# Altium PCB 40V Sample Layout.PcbDoc
Units mil, origin at the board's own origin, x right, y up, seen from the top; angles counter-clockwise.
Board outline 1700 x 2030 mil, 4 copper layers (Top Layer, MidLayer1, MidLayer2, Bottom Layer); 21 components, 11 nets, 44 pads, 36 vias.
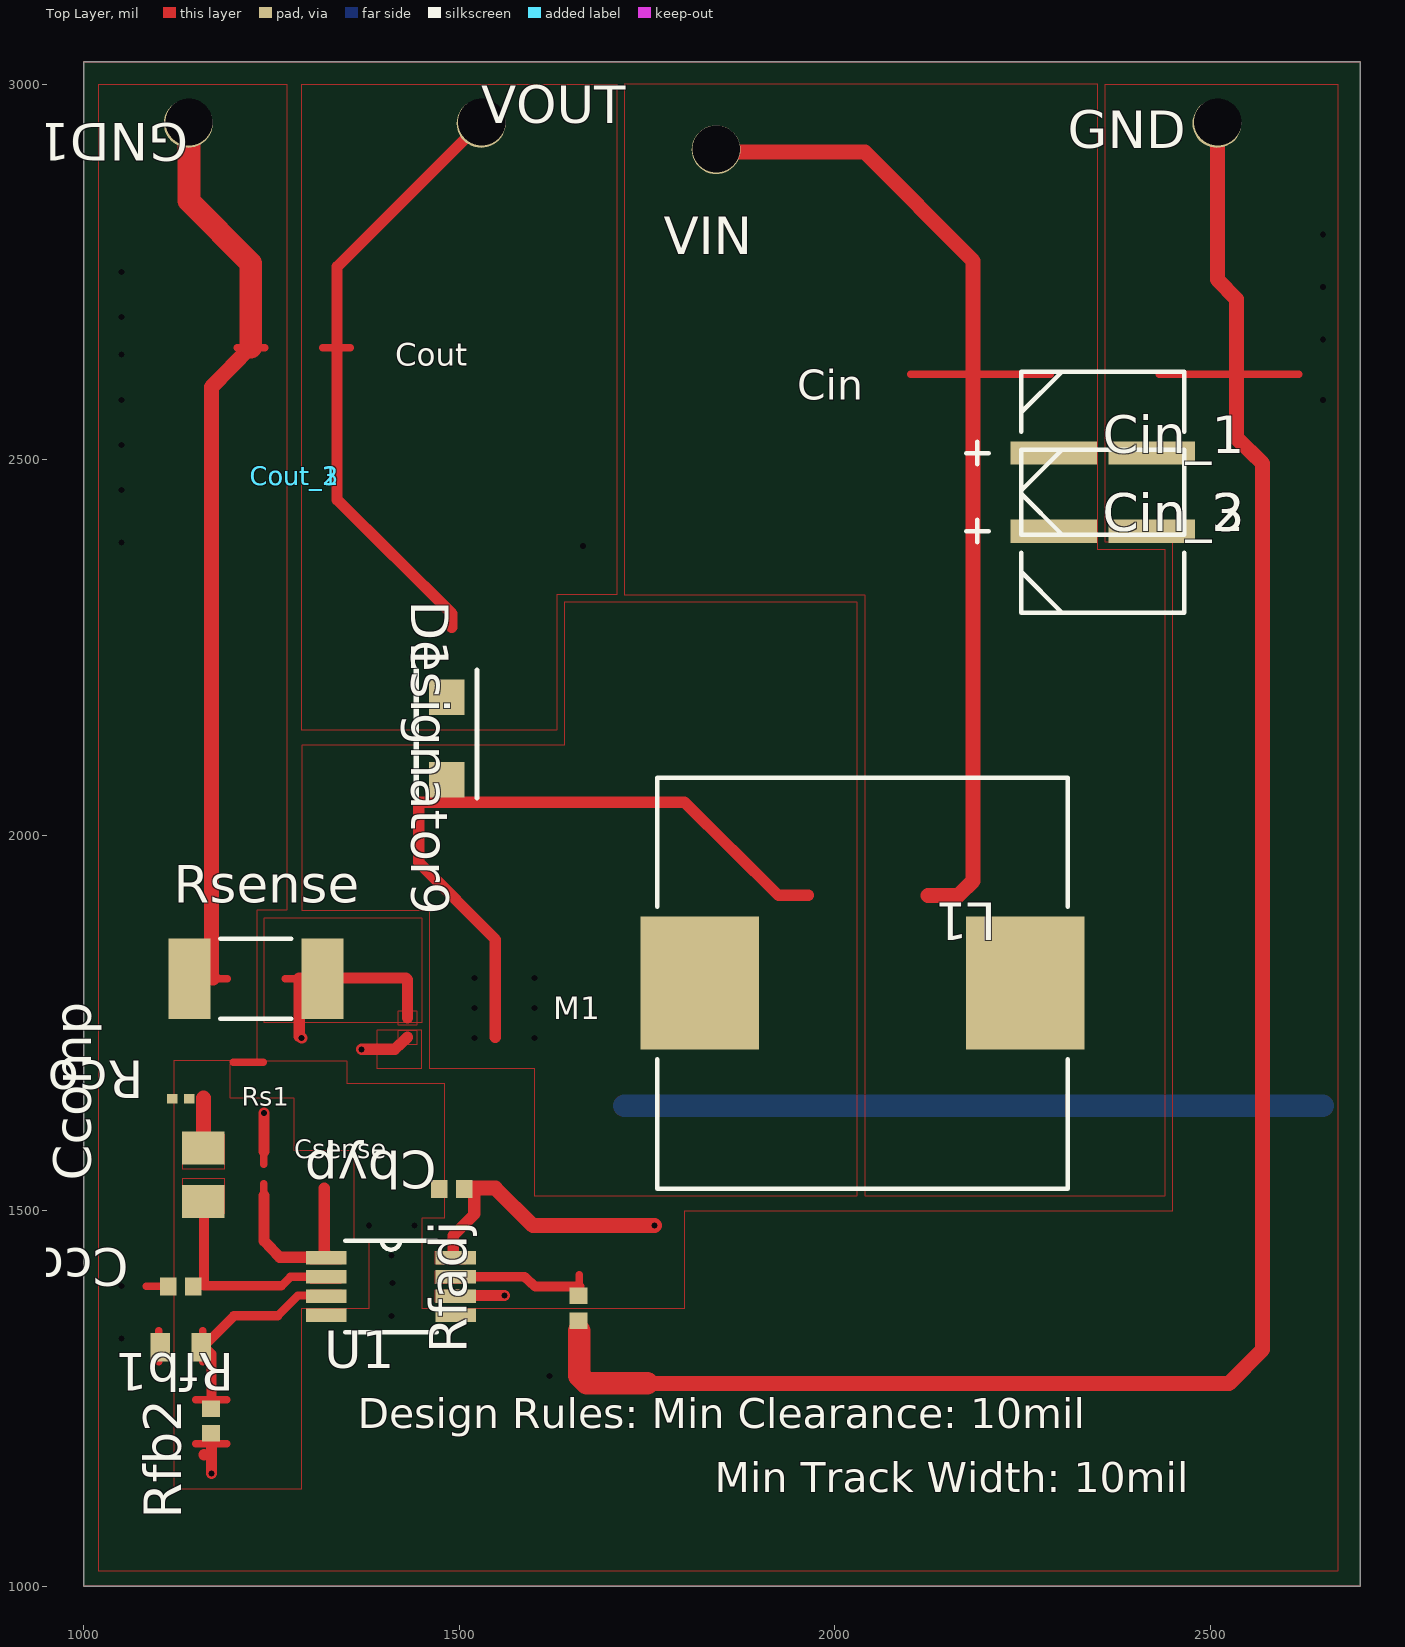
[diagram p0: Top Layer view]
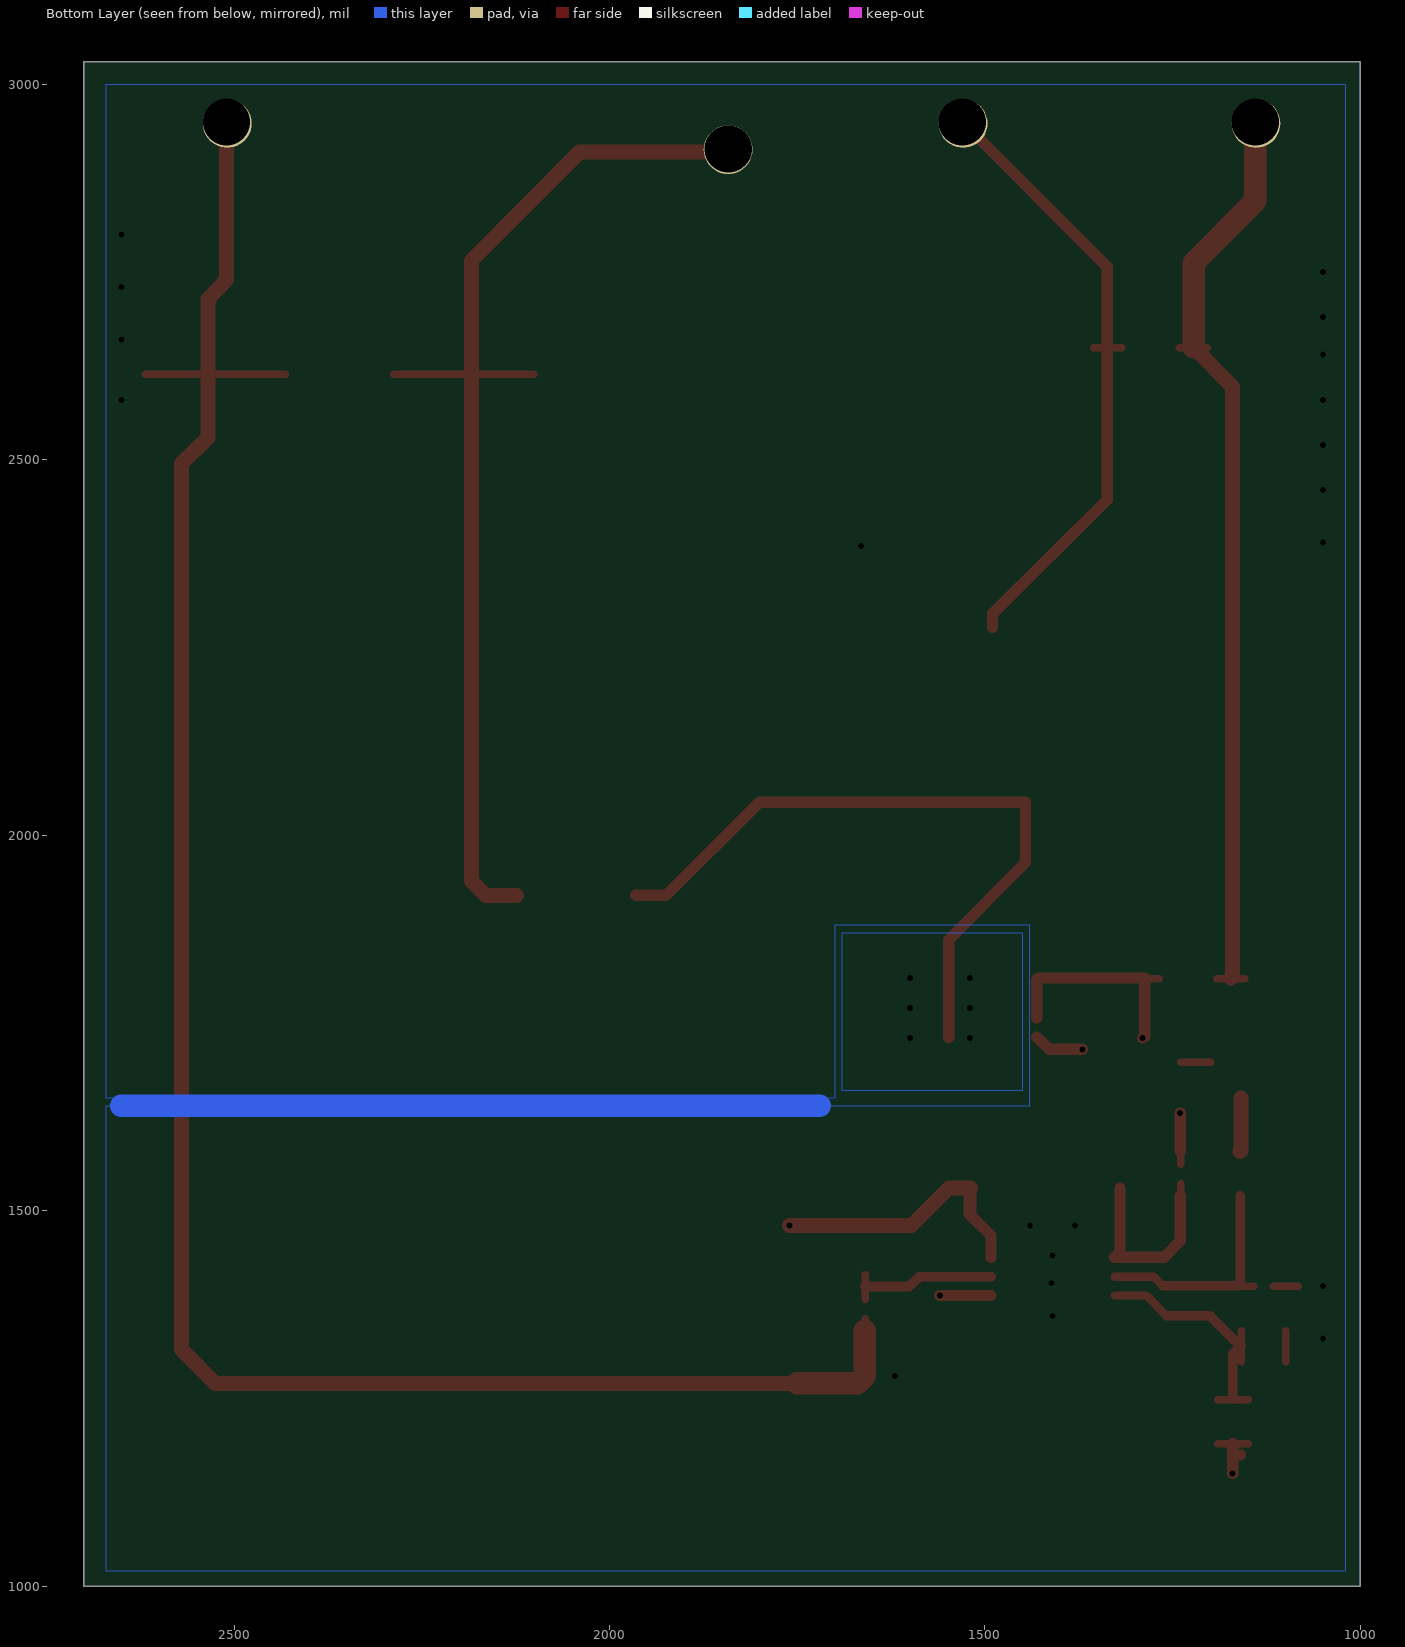
[diagram p1: Bottom Layer view, seen from below]
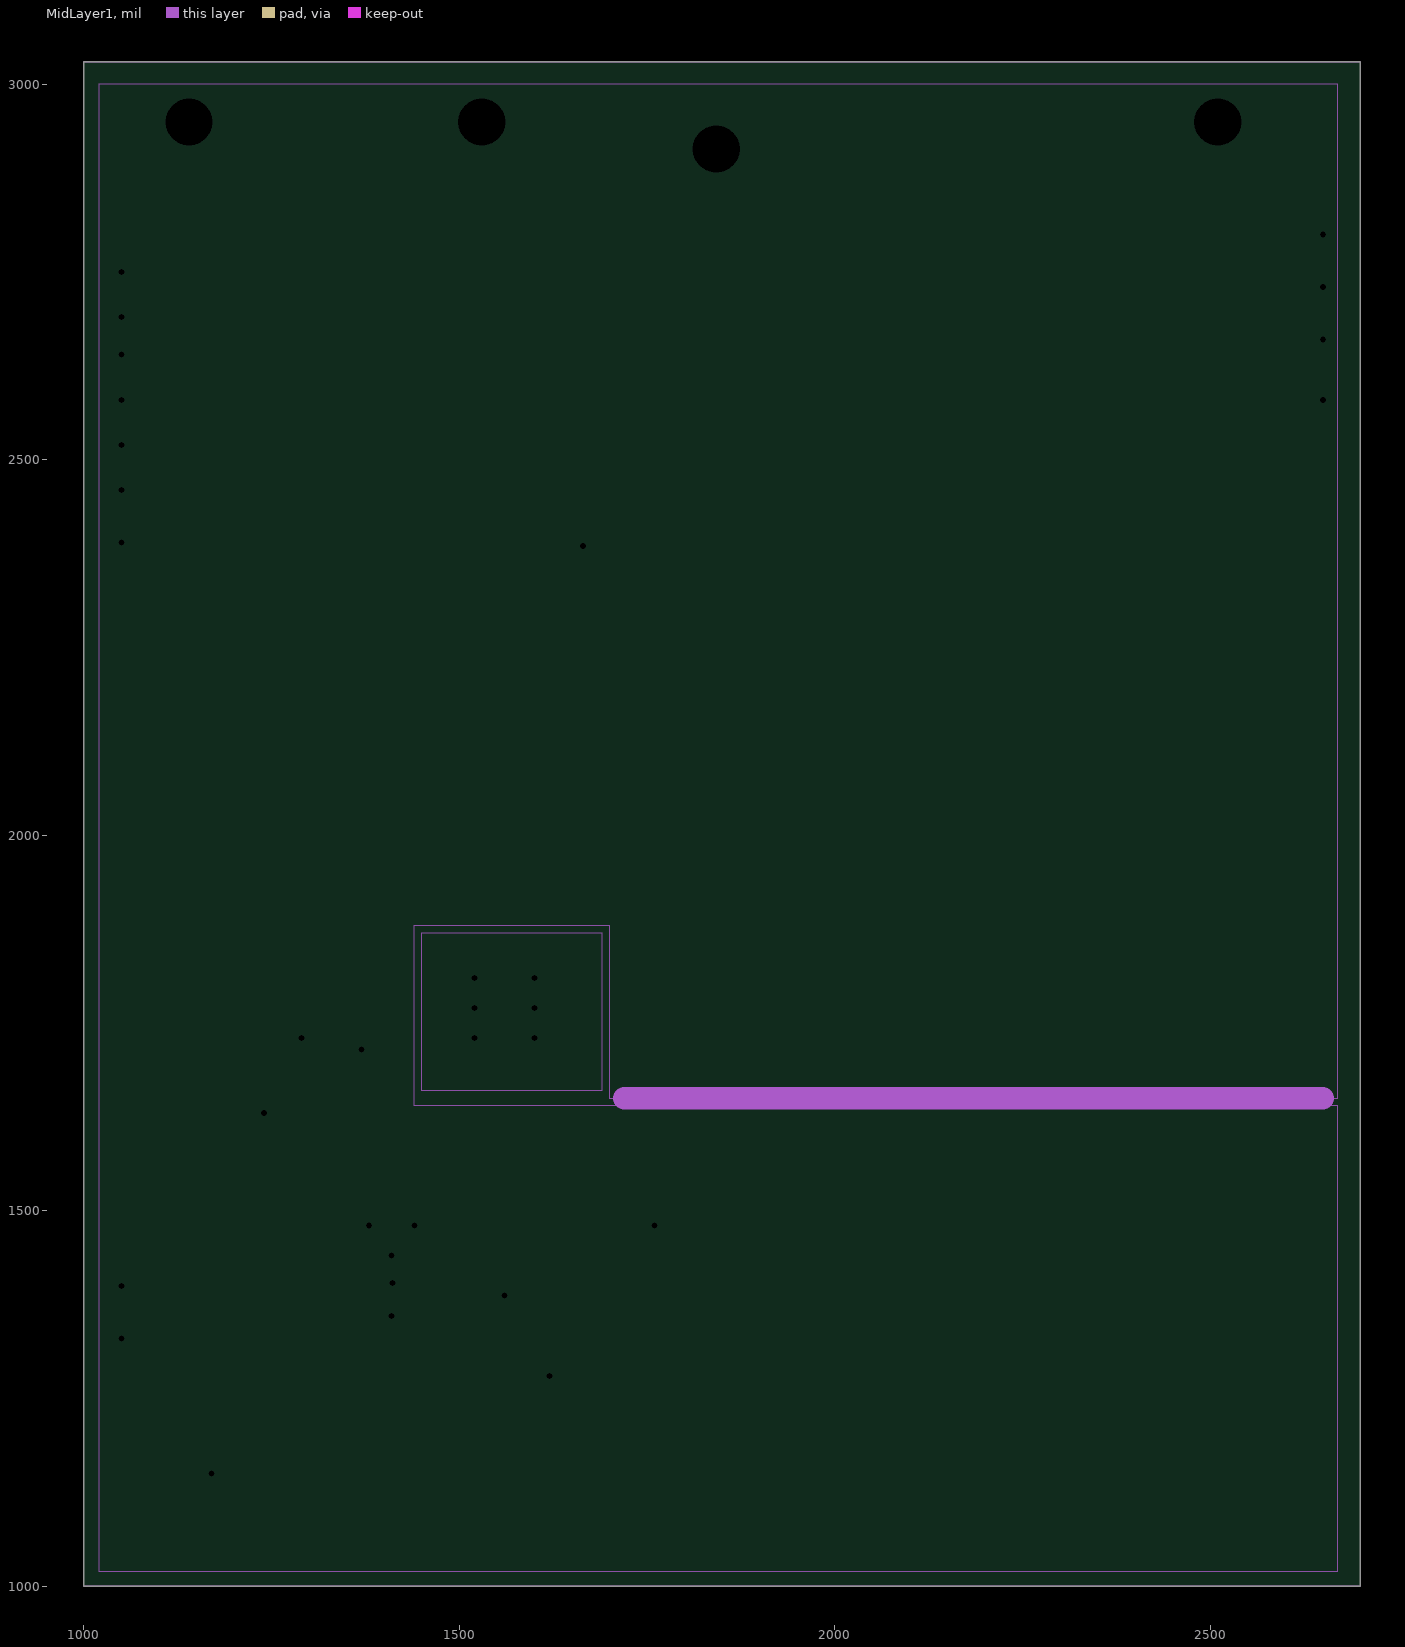
[diagram p2: MidLayer1]
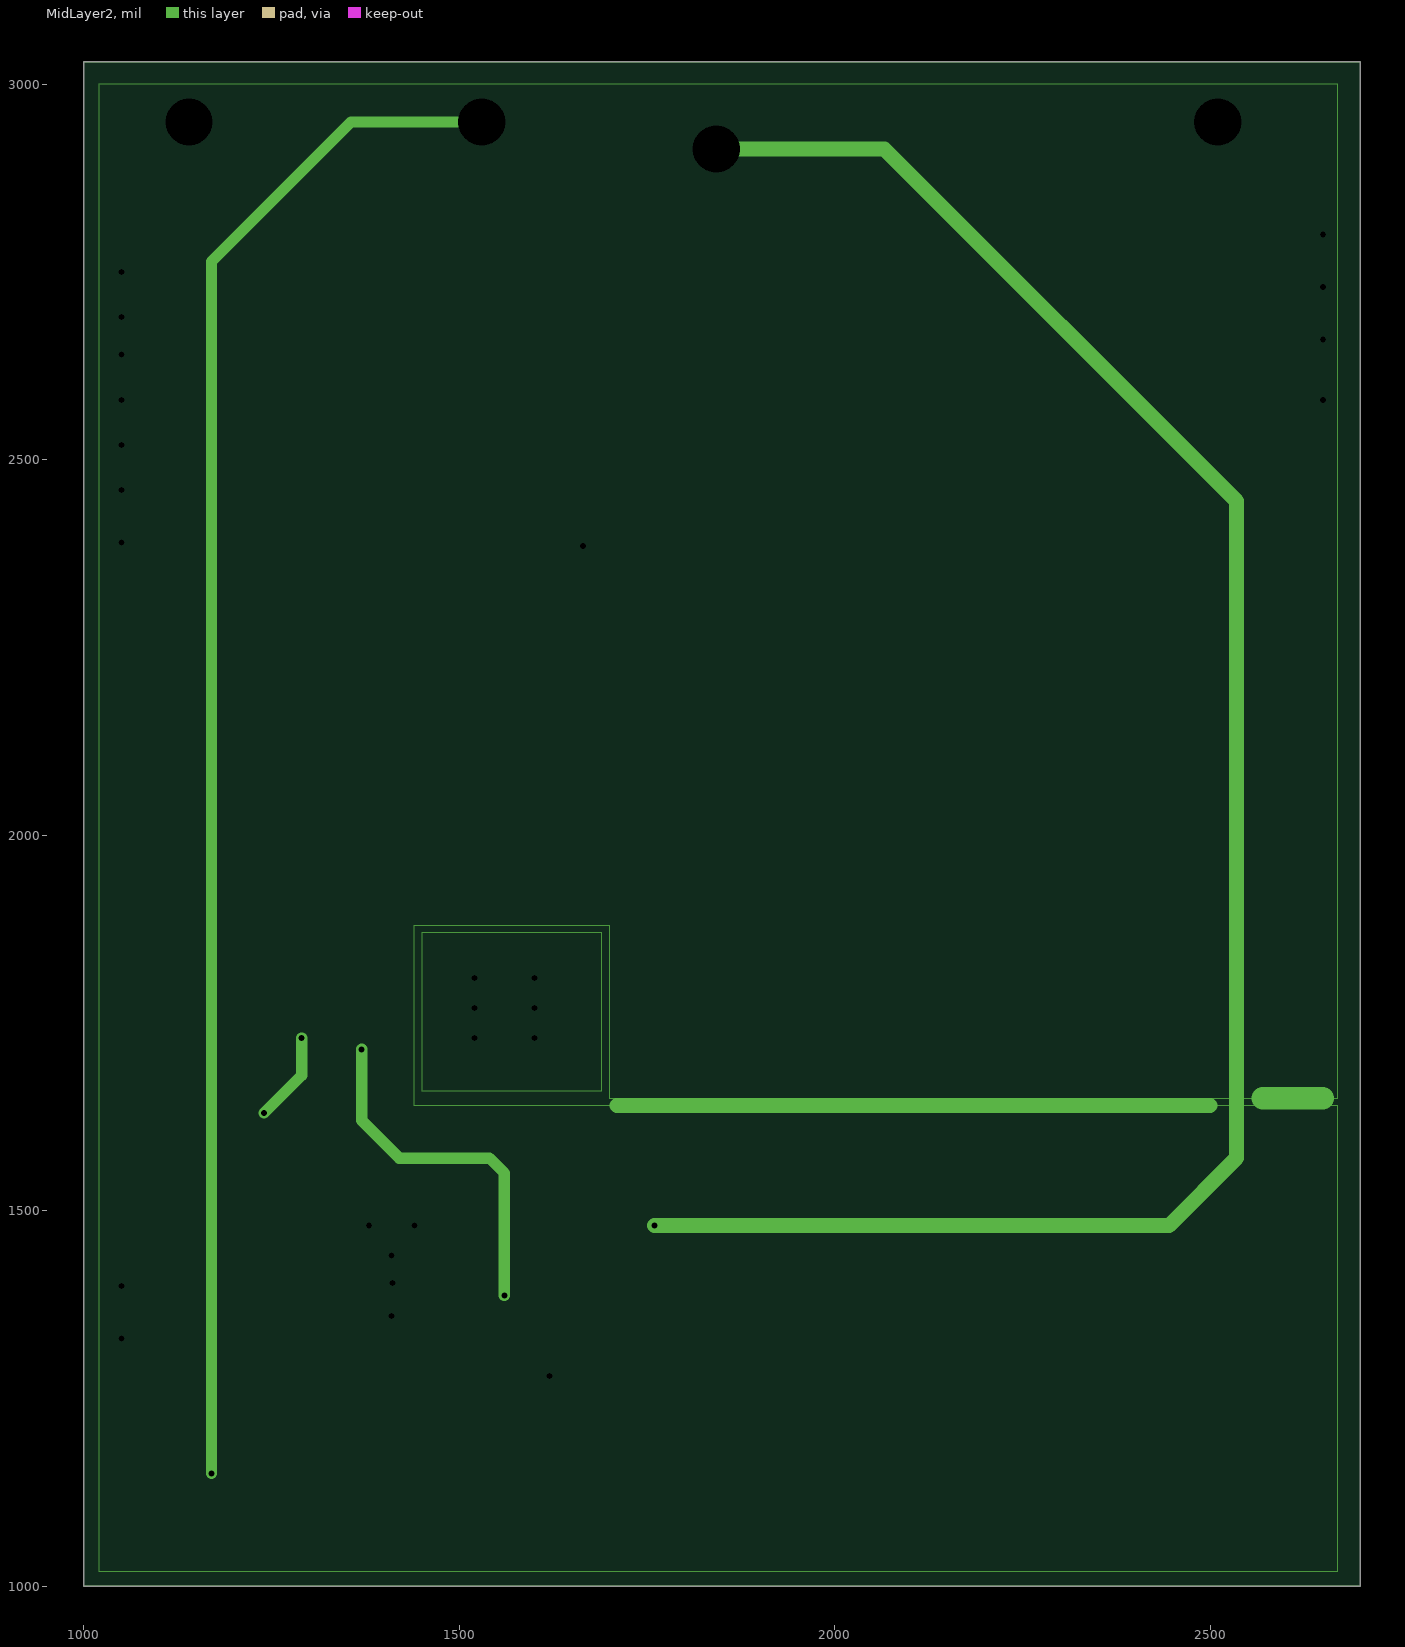
[diagram p3: MidLayer2]

## Layer stack, top to bottom
Top Layer: signal copper 1.4
Dielectric: core 12.6, FR-4, Dk 4.8
MidLayer1: signal copper 1.4
Dielectric: prepreg 12.6, FR-4, Dk 4.8
MidLayer2: signal copper 1.4
Dielectric: core 12.6, FR-4, Dk 4.8
Bottom Layer: signal copper 1.4

## Board outline
1000,1000 2700,1000 2700,3030 1000,3030

## Design rules (kind name [scope] priority, off if disabled: settings)
PlaneConnect [All] p0: scope1count=1 scope1_0_kind=Board scope1_0_value=Board scope2count=1 scope2_0_kind=Board scope2_0_value=Board commentlength=0 planeconnectstyle=Direct reliefexpansion=20 reliefentries=4 reliefconductorwidth=10 reliefairgap=10
PlaneConnect [All] p1: planeconnectstyle=Direct reliefexpansion=20 reliefentries=4 reliefconductorwidth=10 reliefairgap=10
PolygonConnect [All] p0: scope1count=1 scope1_0_kind=Board scope1_0_value=Board scope2count=1 scope2_0_kind=Board scope2_0_value=Board commentlength=0 connectstyle=Direct reliefconductorwidth=10 reliefentries=4 polygonreliefangle="90 Angle"
PolygonConnect [All] p1: connectstyle=Direct reliefconductorwidth=10 reliefentries=4 polygonreliefangle="90 Angle"

## Components (designator, comment, footprint, x,y, rotation, side; value= is the part's Value field where it differs from the comment)
Cbyp "" 0402 1490,1529 r180 top
Ccomp "" 0805 1159,1548 r90 top
Ccomp2 "" 0402 1129,1399 r180 top
Cin_1 "" CAPSMT_62_E61#1 2357,2509 r0 top
Cin_2 "" CAPSMT_62_E61#1 2357,2405 r0 top
Cin_3 "" CAPSMT_62_E61#2 2357,2405 r0 top
Cout_1 "" Panasonic_G 1281,2479 r180 top
Cout_2 "" Panasonic_G 1281,2479 r180 top
Cout_3 "" Panasonic_G 1281,2479 r180 top
D1 "" SOD-123F 1483,2129 r270 top
GND "" TP-1502 2509,2948 r0 top
GND1 "" TP-1502 1139,2948 r180 top
L1 "" SRP1235 2037,1803 r180 top
Rcomp "" 0201 1129,1649 r180 top
Rfadj "" 0402 1659,1370 r90 top
Rfb1 "" 0603 1129,1318 r180 top
Rfb2 "" 0402 1169,1220 r90 top
Rsense "" 2512 1229,1809 r0 top
U1 "" MUA08A 1409,1399 r0 top
VIN "" TP-1502 1842,2913 r0 top
VOUT "" TP-1502 1529,2948 r0 top

## Footprints (in the part's own frame and the unit in brackets; to place one, negate y for a bottom-side part, rotate by r counter-clockwise, add the part's x,y. Pads: shape width x height; smd on the part's side, far side on the other; paste and mask are expansions set on the pad)
0201 [mil]
  rect 14x13 smd: 1(-11.5,0) 2(11.5,0)
0402 [mil]
  rect 22x24 smd: 1(-16.5,0) 2(16.5,0)
0603 [mil]
  rect 26x38 smd: 1(-27.5,0) 2(27.5,0)
0805 [mil]
  rect 44x57 smd: 1(-35.5,0) 2(35.5,0)
2512 [mil]
  rect 56x107 smd: 1(-88.5,0) 2(88.5,0)
  silkscreen extent -47,-54 47,54
CAPSMT_62_E61#1 [mil]
  rect 115.5x31 smd: 1(-65.25,0) 2(65.25,0)
  silkscreen extent -182,-108 108,108
CAPSMT_62_E61#2 [mil]
  rect 115.5x31 smd: 1(-65.25,0) 1(-65.25,0) 1(-65.25,0) 1(-65.25,0) 2(65.25,0) 2(65.25,0) 2(65.25,0) 2(65.25,0)
  silkscreen extent -182,-108 108,108
MUA08A [mil]
  rect 54x18 smd: 1(-86.5,38.39) 2(-86.5,12.8) 3(-86.5,-12.8) 4(-86.5,-38.39) 5(86.5,-38.39) 6(86.5,-12.8) 7(86.5,12.8) 8(86.5,38.39)
  silkscreen extent -61,-61 61,61
Panasonic_G [mil]
SOD-123F [mm]
  rect 1.2x1.2 smd: 1(-1.4,0) 2(1.4,0)
  silkscreen extent -2.31,-1.03 2.01,1.03
SRP1235 [mil]
  rect 157.5x177 smd: 1(-216.75,0) 2(216.75,0)
  silkscreen extent -274,-274 274,274
TP-1502 [mil]
  round 65 / inner round 0 / far side round 65 hole 32: 1(0,0)

## Via types
v1: diameter 0, hole 8, Top Layer to Bottom Layer, 32 vias
v2: diameter 0, hole 63, Top Layer to Bottom Layer, 4 vias

## Nets (pads, with @x,y where several pads share a name; then routed paths per layer and width w, separated by ;. In a path a pad name is that pad's centre, name@x,y a point inside that pad or via, vN(x,y) a via of type N, cw(c..) or ccw(c..) an arc to the next point about the centre after c; other vN are vias at no path point)
0: Cbyp.2 Ccomp2.2 Cin_1.2 Cin_2.2 Cin_3.2 GND1.1 GND.1 Rcomp.2 Rfadj.1 Rfb1.2 Rsense.1 U1.4 U1.5 | length 6960.4
  Top Layer w10: 1083,1399.5 Ccomp2.2@1116,1399.5 ; Rfb1.2@1099.5,1299 1099.5,1340 ; Rsense.1@1154,1809 1191,1809 ; 1199,1698 1239,1698 ; 1204,2649 1241,2649 ; 1659.5,1323 Rfadj.1@1659.5,1356 ; 2432,2614 2618,2614
  Top Layer w20: 1172,1810 1170,1812 1170,2597 1222,2650 ; 1750,1270 2525,1270 2570,1315 2570,2495 2535,2529 2535,2615 2535,2714 2510,2740 GND.1@2510,2925
  Top Layer w30: v2(1140,2950) 1140,2845 1222,2762 1222,2650 ; 1660,1340 1660,1280 1670,1270 1750,1270
  MidLayer1 w30: 1720,1650 2650,1650
  MidLayer2 w20: 1710,1640 2500,1640
  MidLayer2 w30: 2570,1650 2650,1650
  Bottom Layer w30: 1720,1640 2650,1640
  other v1: 1620,1280 1050,1330 1410,1360 1050,1400 1411,1404 1410,1440 1380,1480 1440,1480 1050,2390 1050,2460 1050,2520 1050,2580 2650,2580 1050,2640 2650,2660 1050,2690 2650,2730 1050,2750 2650,2800
  other v2: 2510,2950
1: Cbyp.1 Cin_1.1 Cin_2.1 Cin_3.1 L1.1 U1.8 VIN.1 | length 4455.7
  Top Layer w10: 2101,2614 2287,2614
  Top Layer w15: U1.8@1492,1438 1492,1467 1519,1494 1519,1530 ; 1521,1496 1521,1530
  Top Layer w20: 1519,1530 1521,1530 1548,1530 1598,1480 v1(1760,1480) ; VIN.1@1842,2910 2040,2910 2184,2765 2184,2615 2184,1939 2165,1920 2124,1920
  MidLayer2 w20: v1(1760,1480) 2445,1480 2535,1570 2535,2445 2066,2914 v2(1842,2914)
2: Rsense.2 | length 519.1
  Top Layer w10: 1239.5,1562 1239.5,1595 ; 1268,1809 Rsense.2@1305,1809
  Top Layer w15: 1240,1579 v1(1240,1630) ; v1(1290,1730) 1287,1732 1287,1810 1429,1810 1431,1808 1431,1782 1431,1757
  MidLayer2 w15: v1(1240,1630) 1290,1680 v1(1290,1730)
3: U1.1 | length 284.3
  Top Layer w10: 1239.5,1503 1239.5,1536
  Top Layer w15: 1240,1520 1240,1460 1261,1438 1327,1438 1320,1445 1320,1530
4: Rfb1.1 Rfb2.2 U1.3 | length 353.3
  Top Layer w10: 1149,1248.5 1190,1248.5 ; Rfb1.1@1158.5,1299 1158.5,1340
  Top Layer w11: 1258,1360 1285,1387 U1.3@1327,1387
  Top Layer w13: 1170,1249 1170,1309 1159,1320 1160,1320 1200,1360 1258,1360
5: D1.1 Rfb2.1 VOUT.1 | length 2985.7
  Top Layer w10: 1149,1189.5 1190,1189.5 ; 1318,2649 1355,2649
  Top Layer w15: v1(1170,1150) 1170,1190 ; 1490,2277 1490,2295 1337,2447 1337,2650 1337,2757 v2(1530,2950)
  MidLayer2 w15: v1(1170,1150) 1170,2005 1170,2764 1356,2950 v2(1530,2950)
  other v1: 1665,2385
6: Ccomp2.1 Ccomp.1
7: Ccomp.2 Rcomp.1 U1.2 | length 396.4
  Top Layer w10: 1142,1399.5 1175,1399.5
  Top Layer w11: 1263,1400 1275,1412 U1.2@1327,1412
  Top Layer w13: 1160,1520 1160,1400 1263,1400
  Top Layer w20: 1159,1650 1159,1580 Ccomp.2@1160,1579
9: D1.2 L1.2 | length 925
  Top Layer w15: 1548,1731 1548,1757 1548,1782 1548,1808 1548,1861 1446,1964 1446,2044 1800,2044 1925,1920 1965,1920
  other v1: 1520,1730 1600,1730 1520,1770 1600,1770 1520,1810 1600,1810
11: U1.6 | length 612.3
  Top Layer w15: v1(1370,1715) 1414,1715 1431,1731 ; U1.6@1492,1387 1559,1387 v1(1560,1387)
  MidLayer2 w15: v1(1370,1715) 1370,1620 1420,1570 1540,1570 1560,1550 v1(1560,1387)
12: Rfadj.2 U1.7 | length 206.1
  Top Layer w10: Rfadj.2@1659.5,1382 1659.5,1415
  Top Layer w13: U1.7@1492,1412 1587,1412 1601,1399 1660,1399

## Polygon pours and split planes (outlines as drawn)
11 on Top Layer " " (solid, pour order 0): 1419,1721 1419,1740 1443,1740 1443,1721
2 on Top Layer " " (solid, pour order 1): 1419,1747 1419,1766 1443,1766 1443,1747
11 on Top Layer " " (solid, pour order 2): 1468,1378 1468,1395 1508,1395 1508,1378
12 on Top Layer " " (solid, pour order 3): 1468,1403 1468,1420 1508,1420 1508,1403
1 on Top Layer " " (solid, pour order 4): 1468,1429 1468,1446 1508,1446 1508,1429
4 on Top Layer " " (solid, pour order 5): 1302,1378 1302,1395 1342,1395 1342,1378
7 on Top Layer " " (solid, pour order 6): 1302,1403 1302,1420 1342,1420 1342,1403
3 on Top Layer " " (solid, pour order 7): 1302,1429 1302,1446 1342,1446 1342,1429
7 on Top Layer " " (solid, pour order 8): 1132,1496 1132,1543 1187,1543 1187,1496
7 on Top Layer " " (solid, pour order 9): 1132,1555 1132,1602 1187,1602 1187,1555
11 on Top Layer " " (solid, pour order 13): 1450,1740 1390,1740 1390,1690 1450,1690
1 on Top Layer " " (solid, pour order 14): 2040,1520 2440,1520 2440,2380 2350,2380 2350,3000 1720,3000 1720,2320 2040,2320
2 on Top Layer " " (solid, pour order 15): 1450,1750 1240,1750 1240,1890 1450,1890
9 on Top Layer " " (solid, pour order 16): 1460,1690 1600,1690 1600,1520 2030,1520 2030,2310 1640,2310 1640,2120 1290,2120 1290,1900 1460,1900
5 on Top Layer " " (solid, pour order 17): 1290,3000 1710,3000 1710,2320 1630,2320 1630,2140 1290,2140
0 on Top Layer " " (solid, pour order 21): 2360,3000 2670,3000 2670,1020 1020,1020 1020,3000 1270,3000 1270,1900 1230,1900 1230,1700 1120,1700 1120,1130 1290,1130 1290,1370 1380,1370 1380,1460 1360,1460 1360,1580 1280,1580 1280,1650 1195,1650 1195,1695 1235,1700 1350,1700 1350,1670 1480,1670 1480,1490 1450,1490 1450,1370 1800,1370 1800,1500 2450,1500 2450,2390 2360,2390
9 on Bottom Layer " " (solid, pour order 10): 1450,1870 1450,1660 1690,1660 1690,1870
0 on Bottom Layer " " (solid, pour order 18): 1020,3000 1020,1020 2670,1020 2670,1640 1440,1640 1440,1880 1700,1880 1700,1650 2670,1650 2670,3000
9 on MidLayer2 " " (solid, pour order 11): 1450,1870 1450,1660 1690,1660 1690,1870
9 on MidLayer1 " " (solid, pour order 12): 1450,1870 1690,1870 1690,1660 1450,1660
0 on MidLayer2 " " (solid, pour order 19): 1020,3000 1020,1020 2670,1020 2670,1640 1440,1640 1440,1880 1700,1880 1700,1650 2670,1650 2670,3000
0 on MidLayer1 " " (solid, pour order 20): 1020,3000 1020,1020 2670,1020 2670,1640 1440,1640 1440,1880 1700,1880 1700,1650 2670,1650 2670,3000

## Other copper
Multi-Layer:
  the board outline again, w1

## Silkscreen, mask and mechanical layers (free items; w line width, h text height)
Top Overlay:
  text "Cout" at 1415,2625 h30
  text "Cin" at 1950,2580 h40
  text "M1" at 1625,1755 h30
  text "Rs1" at 1210,1640 h25
  text "Csense" at 1280,1570 h25
  text "Design Rules: Min Clearance: 10mil" at 1365,1210 h40
  text "Min Track Width: 10mil" at 1840,1125 h40

## Text inside footprints (layer, text, board x,y; h text height)
D1: Top Overlay "Designator9" at 1436,2312 h50 r270